# EAGLE board merkur-connect pi-expansionboard (EAGLE 6.4)
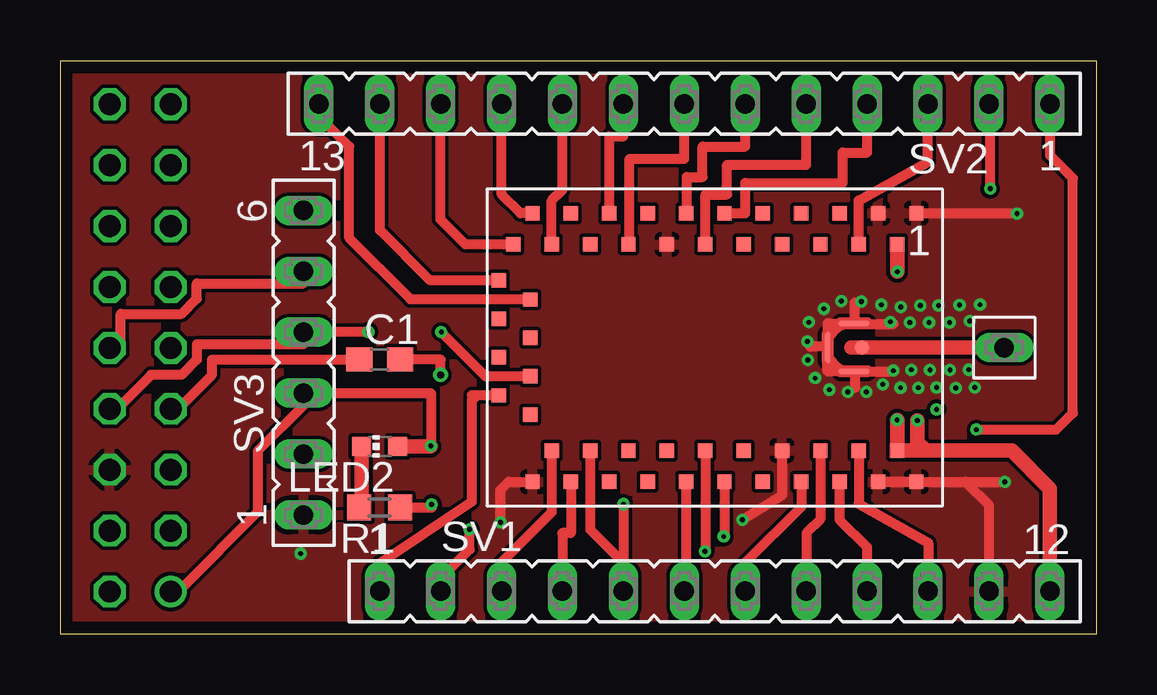
[diagram p0: board, top side]
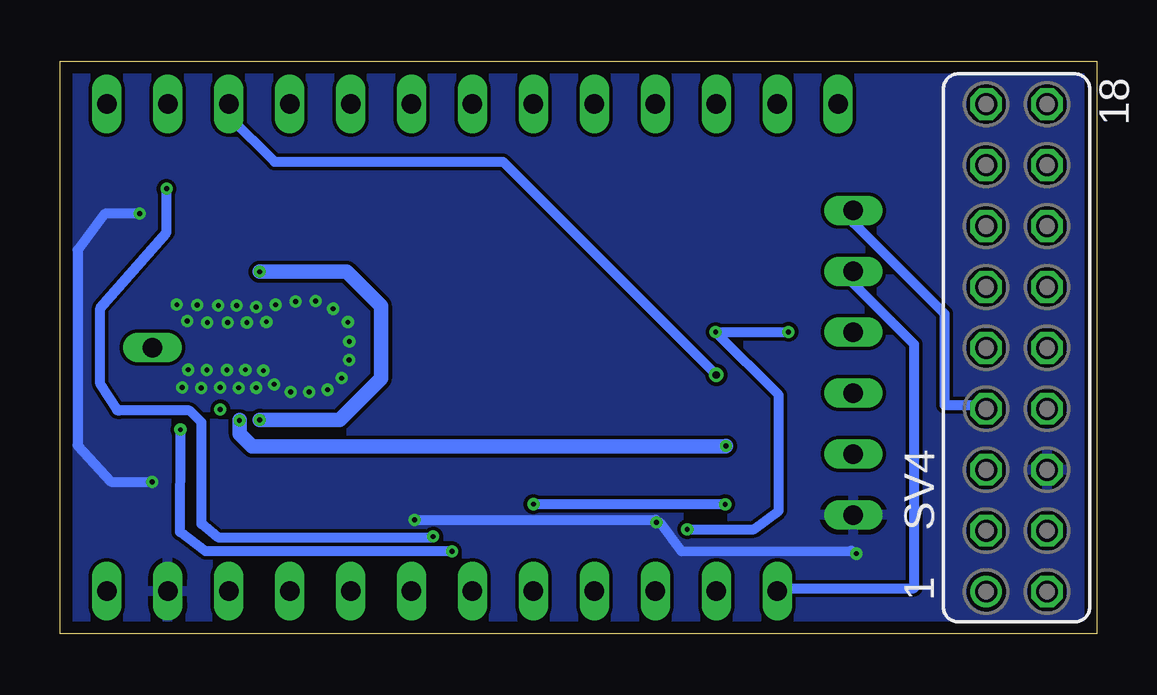
[diagram p1: board, bottom side, seen from below]

Size 43.22 x 23.87 mm. Coordinates in mm from the lower left corner, seen from the top.
Outline: 0,0 43.22,0 43.22,23.87 0,23.87 0,0
Copper layers (1*16): Top 0.035mm / dielectric 1.5mm / Bottom 0.035mm
Design rules "PCB-POOL *": minimum track width 16mil, minimum drill 12mil, track to track 6mil, track to pad 6mil, pad to pad 6mil, via to via 6mil, smd to smd 6mil, copper to edge 20mil, drill to drill 8mil, minimum pad ring 8mil, minimum via ring 6mil, stop-mask expansion 3mil, vias tented up to drill 0mil, thermal gap 8mil

## Footprints (pad centres in the part's own frame; a part is rotated, then mirrored left to right if it is on the bottom)
C0603 = smd 1.1 x 1: 1 -0.85,0; 2 0.85,0
A-M10 = smd 0.6 x 0.6: 1 -8.4,-5.6; 2 -7.6,-4.3; 3 -6.8,-5.6; 4 -6,-4.3; 5 -5.2,-5.6; 6 -4.4,-4.3; 7 -3.6,-5.6; 8 -2.8,-4.3; 9 -2,-5.6; 10 -1.2,-4.3; 11 -0.4,-5.6; 12 0.4,-4.3; 13 1.2,-5.6; 14 2,-4.3; 15 2.8,-5.6; 16 3.6,-4.3; 17 4.4,-5.6; 18 5.2,-4.3; 19 6,-5.6; 20 6.8,-4.3; 21 7.6,-5.6; 22 8.4,-4.3; 23 9,-2.8; 24 7.7,-2; 25 9,-1.2; 26 7.7,-0.4; 27 9,0.4; 28 7.7,1.2; 29 9,2; 30 7.7,2.8; 31 7.6,5.6; 32 6.8,4.3; 33 6,5.6; 34 5.2,4.3; 35 4.4,5.6; 36 3.6,4.3; 37 2.8,5.6; 38 2,4.3; 39 1.2,5.6; 40 0.4,4.3; 41 -0.4,5.6; 42 -1.2,4.3; 43 -2,5.6; 44 -2.8,4.3; 45 -3.6,5.6; 46 -4.4,4.3; 47 -5.2,5.6; 48 -6,4.3; 49 -6.8,5.6; 50 -7.6,4.3; 51 -8.4,5.6; 53 -6.14,0 | smd 1.3 x 0.2: 52 -5.8,1; 54 -5.8,-1 | smd 0.2 x 1.3: 55 -4.7,0
CHIP-LED0603 = smd 0.8 x 0.8: A 0,-0.75; C 0,0.75
R0603 = smd 1 x 1.1: 1 -0.85,0; 2 0.85,0
FE12 = drill 0.813 long: 1 -13.97,0; 2 -11.43,0; 3 -8.89,0; 4 -6.35,0; 5 -3.81,0; 6 -1.27,0; 7 1.27,0; 8 3.81,0; 9 6.35,0; 10 8.89,0; 11 11.43,0; 12 13.97,0
FE13 = drill 0.813 long: 1 -15.24,0; 2 -12.7,0; 3 -10.16,0; 4 -7.62,0; 5 -5.08,0; 6 -2.54,0; 7 0,0; 8 2.54,0; 9 5.08,0; 10 7.62,0; 11 10.16,0; 12 12.7,0; 13 15.24,0
FE06 = drill 0.813 long: 1 -6.35,0; 2 -3.81,0; 3 -1.27,0; 4 1.27,0; 5 3.81,0; 6 6.35,0
FE09-2 = drill 0.914: 1 -10.16,1.27 | drill 0.914 octagon: 2 -10.16,-1.27; 3 -7.62,1.27; 4 -7.62,-1.27; 5 -5.08,1.27; 6 -5.08,-1.27; 7 -2.54,1.27; 8 -2.54,-1.27; 9 0,1.27; 10 0,-1.27; 11 2.54,1.27; 12 2.54,-1.27; 13 5.08,1.27; 14 5.08,-1.27; 15 7.62,1.27; 16 7.62,-1.27; 17 10.16,1.27; 18 10.16,-1.27
FE05-1 = drill 0.813 long: 1 -5.08,0

## Placement (x,y rotation side)
C1  100nF  [C0603]  13.33,11.43 0 top
IC1  DERFMEGA128-XXM10  [A-M10]  27.3,11.94 180 top
LED2  red  [CHIP-LED0603]  13.33,7.81 90 top
R1  300 Ohm  [R0603]  13.33,5.27 180 top
SV1  [FE12]  27.3,1.78 0 top
SV2  [FE13]  26.03,22.1 180 top
SV3  [FE06]  10.15,11.3 90 top
SV4  [FE09-2]  3.35,11.92 90 bottom
U$1  PAD  [FE05-1]  39.36,17.01 90 top

## Library data of the parts
C1 R1 = rcl
IC1 = deRFmodules
LED2 = led
SV1-SV4 = con-lsta; OC_FARNELL: unknown; OC_NEWARK: unknown
U$1 = Pad

## Nets
+3V3: IC1.2 IC1.50 LED2.A SV1.12 SV3.3 SV4.1
GND: IC1.1 IC1.3 IC1.14 IC1.31 IC1.44 IC1.49 IC1.51 IC1.52 IC1.54 IC1.55 SV1.11 SV3.1 SV4.6
N$1: IC1.29 SV1.1 SV3.5 SV4.10
N$2: IC1.28 SV1.2 SV3.4 SV4.8
N$3: IC1.45 SV1.7
N$4: IC1.46 SV1.8
N$5: IC1.47 SV1.9
N$6: IC1.48 SV1.10
N$7: C1.2 IC1.4 SV2.3
N$8: IC1.34 R1.1 SV1.5
N$9: IC1.33 SV1.4
N$10: IC1.32 SV1.3
N$11: IC1.17 SV2.8
N$12: IC1.16 SV2.7
N$13: IC1.20 SV2.9
N$14: IC1.22 SV2.11
N$15: IC1.21 SV2.10
N$16: IC1.23 SV2.12
N$17: IC1.13 SV2.6
N$18: IC1.12 SV2.5
N$19: IC1.11 SV2.4
N$20: IC1.41 SV2.2
N$21: IC1.40 SV2.1
N$22: IC1.39 SV1.6
N$23: LED2.C R1.2
N$24: IC1.24 SV2.13
N$27: C1.1 SV3.6 SV4.7
RFOUT: IC1.53 U$1.1

## Tracks (layer width: path | path; a pad name or v marks a point on that pad's centre or on a via)
+3V3  (via drill 0.2)
  Top 0.254: 34.92,8.76 v34.9,8.92
  Top 0.406: SV1.12 | 15.44,7.81 v15.46,7.83 15.46,10.03 SV3.3 10.15,9.53 8.25,7.62 8.25,5.08 5.07,1.91 SV4.1 | IC1.2
  Top 0.61: 36.09,7.64 IC1.50 v34.9,8.92 | 36.09,7.64 39.68,7.64 41.27,6.05 SV1.12 | LED2.A 15.44,7.81 | v35.74,8.9 35.74,7.98 36.09,7.64 | v34.9,15.1 IC1.2
  Bottom 0.406: 35.72,8.91 v35.74,8.9
  Bottom 0.61: 35.72,8.91 35.72,8.76 | v15.46,7.83 15.48,7.81 35.21,7.81 35.73,8.33 35.73,8.89 v35.74,8.9 | v34.9,8.92 31.57,8.92 29.84,10.64 29.84,13.67 31.27,15.1 v34.9,15.1
GND  (via drill 0.2)
  Top 0.406: SV1.11 38.72,5.37 37.74,6.34 IC1.51 IC1.49 39.3,6.34 v39.38,6.34 | v39.89,17.52 35.72,17.52 IC1.1 | IC1.44 30.1,5.77 v28.44,4.75 | v18.36,4.64 18.36,5.99 18.71,6.34 IC1.31 | v10.03,3.34 | v34.74,10.97 34.59,10.94 IC1.52 32,10.94 IC1.55 32,12.94 IC1.54 | 33.14,10.92 33.14,10.26 | 31.98,11.98 31.26,11.98 | 34.7,12.95 | 33.13,12.93 33.13,13.79 | 32.9,12.93 34.75,12.93
  Bottom 0.406: v39.39,6.34 v39.38,6.34 v39.39,6.34 41.09,6.34 42.49,7.86 42.49,16.01 41.36,17.52 v39.89,17.52 | v28.44,4.75 18.38,4.75 v18.36,4.64 18.22,4.64 17.32,3.44 10.24,3.46 v10.03,3.34
  other vias: 35.05,13.63 35.86,13.68 36.62,13.69 34.62,13.01 35.43,12.98 36.23,12.98 37.92,13.04 37.08,12.97 37.5,13.71 35.49,11.01 36.27,11 35.78,10.26 36.54,10.27 37.1,11 37.34,10.25 37.88,11.01 34.23,13.72 33.4,13.86 32.57,13.87 31.84,13.55 31.22,12.99 31.16,12.19 31.18,11.42 31.48,10.66 32.07,10.18 32.84,10.08 33.61,10.09 34.3,10.4 35.04,10.26 38.35,13.72 38.13,10.27
  pour Top: -0.99,25.34 44.44,25.19 44.44,-1 -0.99,-0.85
  pour Bottom: -0.92,25.34 44.44,25.19 44.44,-1 -0.92,-0.85
N$1
  Top 0.406: IC1.29 17.38,9.94 | 17.38,9.94 17.18,9.94 | SV1.1 13.33,2.94 17.17,5.51 17.17,9.73 17.38,9.94 | SV3.5 10.15,14.61 5.71,14.61 5.71,13.97 5.07,13.34 2.53,13.34 2.53,12.06 SV4.10
  Bottom 0.406: SV3.5 10.15,14.61 7.61,12.06 7.61,1.91 13.33,1.91 SV1.1
N$2  (via drill 0.2)
  Top 0.406: IC1.28 17.74,10.74 v15.89,12.58 | v12.86,12.59 11.69,12.59 SV3.4 10.15,12.06 5.71,12.06 5.71,11.43 5.07,10.79 3.8,10.79 2.53,9.53 SV4.8 | SV1.2 15.87,2.31 17.08,3.52 v17.08,4.36
  Bottom 0.406: 15.87,12.56 v15.89,12.58 | v15.89,12.58 v12.86,12.58 v12.86,12.59 | v17.08,4.36 14.29,4.36 13.26,5.13 13.26,9.95 v15.89,12.58
N$3
  Top 0.406: IC1.45 30.9,5.29 28.54,2.93 28.54,1.81 SV1.7
N$4
  Top 0.406: IC1.46 31.7,4.78 31.12,4.2 31.12,1.79 SV1.8
N$5
  Top 0.406: IC1.47 32.5,4.76 33.64,3.62 SV1.9
N$6
  Top 0.406: IC1.48 33.3,5.42 36.19,3.8 SV1.10
N$7  (via drill 0.3)
  Top 0.406: IC1.4 33.3,18.06 36.18,19.67 36.18,22.09 SV2.3 | C1.2 15.87,11.43 v15.87,10.79
  Bottom 0.406: v15.87,10.79 24.76,19.68 34.28,19.68 36.19,21.59 SV2.3
N$8  (via drill 0.2)
  Top 0.406: IC1.34 22.1,4.35 23.49,2.96 23.49,2.83 | 23.49,2.83 SV1.5 | R1.1 15.49,5.27 v15.5,5.4 | v23.49,5.41 23.49,2.92 23.49,2.83
  Bottom 0.406: v15.5,5.4 23.52,5.4 v23.49,5.41
N$9
  Top 0.406: IC1.33 21.3,4.21 20.95,4.21 SV1.4
N$10
  Top 0.406: IC1.32 20.5,5.07 18.42,2.99 18.42,1.79 SV1.3
N$11
  Top 0.406: IC1.17 22.9,20.74 23.47,20.73 23.52,22.07 SV2.8
N$12
  Top 0.406: IC1.16 23.74,16.24 23.74,19.81 26.03,19.81 SV2.7
N$13
  Top 0.406: IC1.20 20.5,18.06 20.94,18.5 20.94,22.09 SV2.9
N$14
  Top 0.406: IC1.22 16.9,16.24 15.86,17.28 SV2.11
N$15
  Top 0.406: IC1.21 19.19,17.54 18.42,18.32 18.42,22.09 SV2.10
N$16
  Top 0.406: IC1.23 15.43,14.74 13.34,16.83 13.34,22.08 SV2.12
N$17
  Top 0.406: IC1.13 26.13,17.54 26.13,19.05 26.79,19.05 26.79,20.32 28.57,20.32 SV2.6
N$18
  Top 0.406: IC1.12 26.92,16.24 26.92,18.31 27.8,18.31 27.8,19.56 31.11,19.56 SV2.5
N$19
  Top 0.406: IC1.11 28.57,17.54 28.57,18.8 32.63,18.8 32.63,20.07 33.65,20.07 SV2.4
N$20  (via drill 0.2)
  Top 0.406: IC1.41 27.7,4.04 v27.67,4.05 | v38.78,18.56 38.78,22.05 SV2.2
  Bottom 0.406: v27.67,4.05 27.73,4.03 36.65,4.03 37.32,4.58 37.32,8.81 37.82,9.31 40.77,9.31 40.79,9.33 40.85,9.33 41.54,10.41 41.54,13.59 38.78,16.73 v38.78,18.56
N$21  (via drill 0.2)
  Top 0.406: IC1.40 26.9,3.46 v26.88,3.44 | v38.2,8.51 38.21,8.52 41.53,8.52 42.22,9.21 42.22,18.99 41.27,19.94 SV2.1
  Bottom 0.406: v26.88,3.44 37.15,3.44 38.21,4.25 38.2,8.33 v38.2,8.51
N$22
  Top 0.406: IC1.39 26.1,1.85 SV1.6
N$23
  Top 0.61: LED2.C 12.58,5.37 R1.2
N$24
  Top 0.406: IC1.24 14.6,13.94 14.6,13.97 12.06,16.51 12.06,20.32 10.79,21.59 SV2.13
N$26  (via drill 0.2)
  other vias: 36.54,9.36
N$27
  Top 0.406: C1.1 6.34,11.43 6.34,10.79 5.07,9.53 SV4.7
  Bottom 0.406: SV3.6 10.15,17.14 6.34,13.34 6.34,9.53 5.07,9.53 SV4.7
RFOUT
  Top 0.61: IC1.53 U$1.1

## Text on the board
bLabel: http://www.coxcoon.at